# EAGLE board POE (EAGLE 6.4)
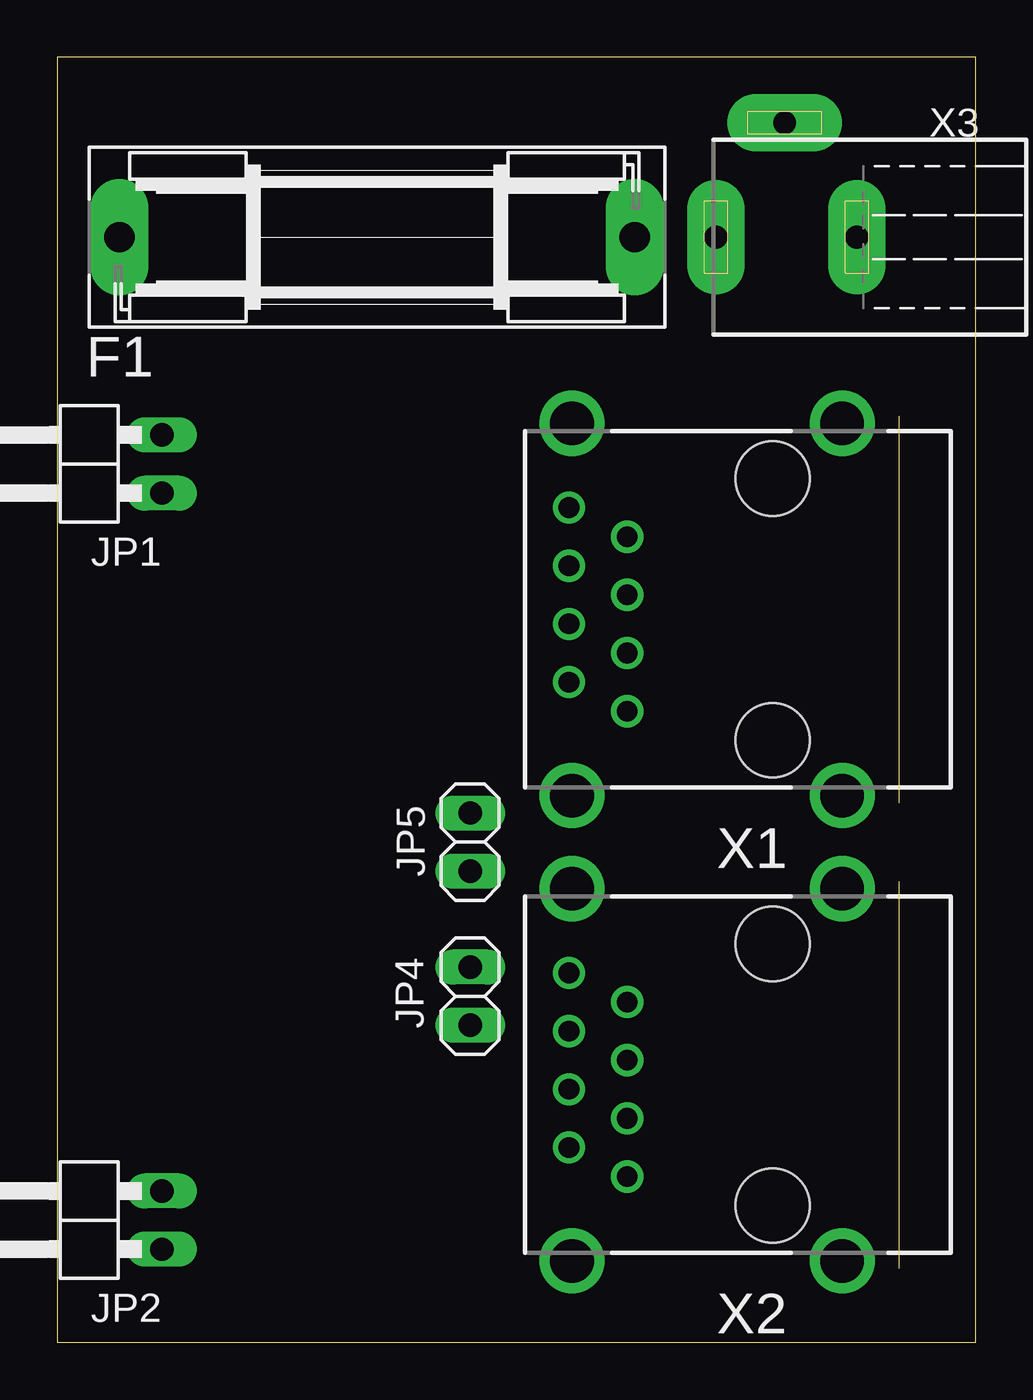
[diagram p0: board, top side]
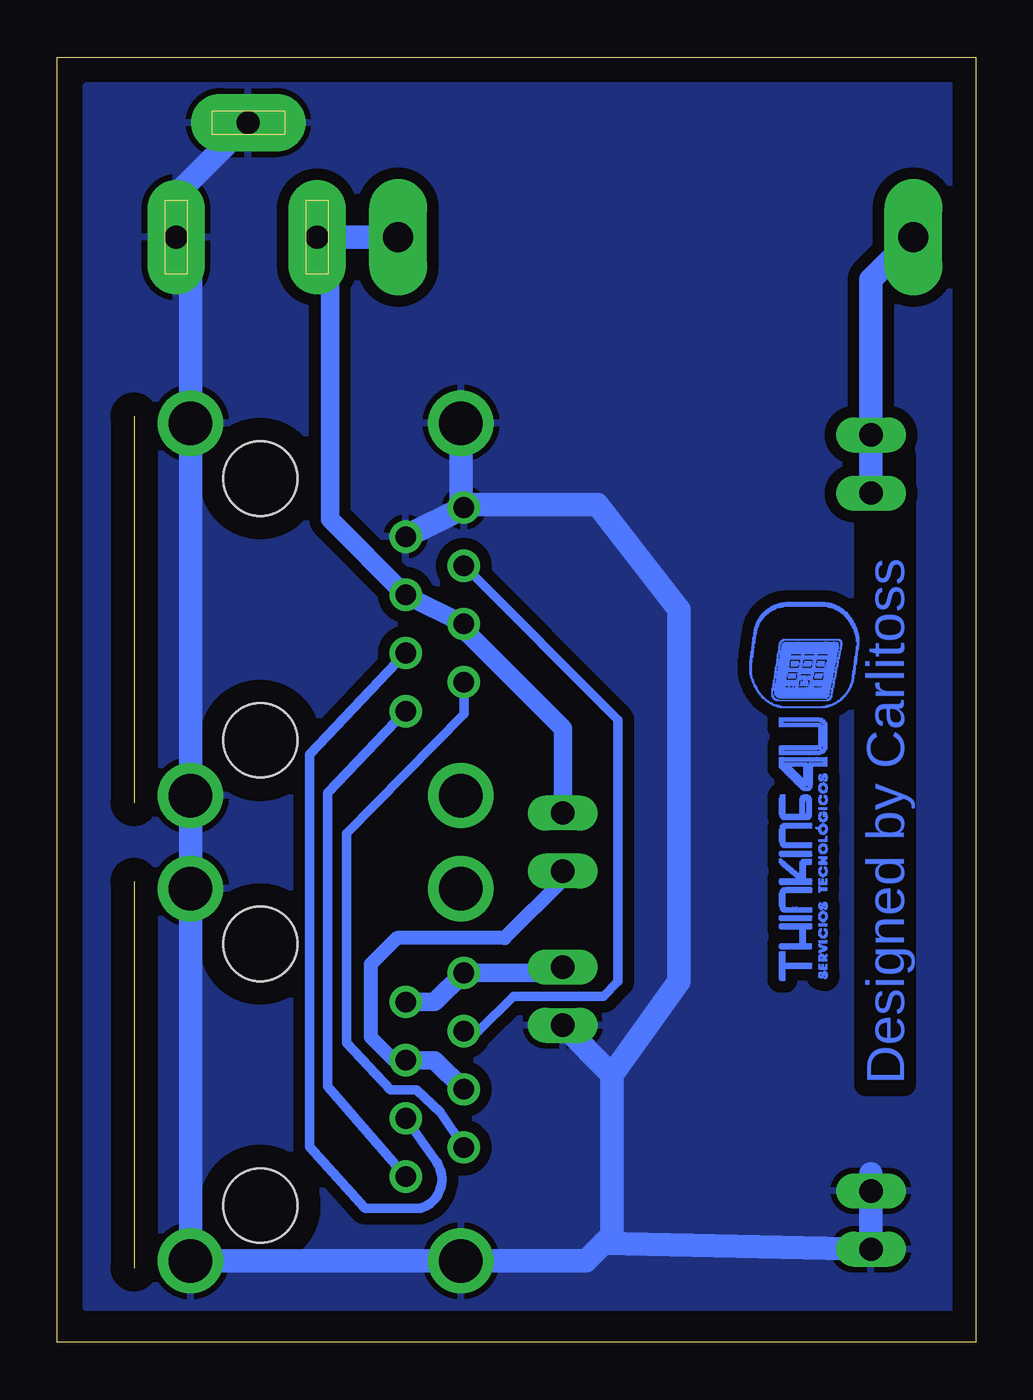
[diagram p1: board, bottom side, seen from below]

Size 40.11 x 56.12 mm. Coordinates in mm from the lower left corner, seen from the top.
Outline: 0,0 40.11,0 40.11,56.12 0,56.12 0,0
Copper layers (1*16): Top 0.035mm / dielectric 1.5mm / Bottom 0.035mm
Design rules "default": minimum track width 10mil, minimum drill 24mil, track to track 20mil, track to pad 20mil, pad to pad 15mil, via to via 8mil, smd to smd 8mil, copper to edge 40mil, drill to drill 8mil, minimum pad ring 10mil, minimum via ring 8mil, stop-mask expansion 4mil, vias tented up to drill 0mil, thermal gap 10mil

## Footprints (pad centres in the part's own frame; a part is rotated, then mirrored left to right if it is on the bottom)
SH22,5 = drill 1.321 pad 2.54 long: 1 -11.252,0; 2 11.252,0
1X02/90 = drill 1.016 long: 1 -1.27,-3.81; 2 1.27,-3.81
1X02 = drill 1.016 long: 1 -1.27,0; 2 1.27,0
RJ45-SHIELD1 = drill 0.9 pad 1.4: 1 -4.445,6.35; 2 -3.175,8.89; 3 -1.905,6.35; 4 -0.635,8.89; 5 0.635,6.35; 6 1.905,8.89; 7 3.175,6.35; 8 4.445,8.89 | drill 1.9 pad 2.5: S1 -8.128,-3.048; S2 8.128,-3.048; S3 -8.128,8.76; S4 8.128,8.76 | hole 3.251: -5.715,0; 5.715,0
733980-62 = drill 1 pad 2.5 long: 1 0,8.57; 2 0,2.42; 3 5,5.57

## Placement (x,y rotation side)
F1  [SH22,5]  13.97,48.26 0 top
JP1  [1X02/90]  0.76,38.35 90 top
JP2  [1X02/90]  0.76,5.33 90 top
JP4  [1X02]  18.03,15.11 90 top
JP5  [1X02]  18.03,21.84 270 top
X1  RJ45-6L21-B  [RJ45-SHIELD1]  31.24,32 90 top
X2  RJ45-6L21-B  [RJ45-SHIELD1]  31.24,11.68 90 top
X3  [733980-62]  37.34,48.26 90 top

## Library data of the parts
F1 = fuse; MF: SCHURTER; MPN: 0031.8201; OC_FARNELL: 1162740; OC_NEWARK: 96F8317
JP1 JP2 JP4 JP5 = pinhead
X1 X2 = con-tycoelectronics; OC_FARNELL: unknown; OC_NEWARK: unknown
X3 = con-conrad

## Nets
GND: JP2.1 JP2.2 JP4.1 X1.7 X1.8 X1.S1 X1.S2 X1.S4 X2.S1 X2.S2 X2.S3 X3.2 X3.3
N$1: F1.1 JP1.1 JP1.2
N$3: X1.6 X2.6
N$6: X1.3 X2.3
N$7: X1.2 X2.2
N$8: X1.1 X2.1
N$9: F1.2 JP5.1 X1.4 X1.5 X3.1
N$10: JP4.2 X2.7 X2.8
N$11: JP5.2 X2.4 X2.5

## Tracks (layer width: path | path; a pad name or v marks a point on that pad's centre or on a via)
GND
  Bottom 0.406: X1.8 22.21,36.3
  Bottom 1.016: X3.3 34.92,50.11 X3.2 34.29,47.63 X1.S2 X1.S1 X2.S2 X2.S1 X2.S3 17.02,3.56 16.26,4.32 | 22.48,36.58 16.51,36.58 12.95,32 12.95,15.75 15.87,11.68 | 15.87,11.68 JP4.1 | 4.57,7.37 JP2.2 JP2.1 16.26,4.32 | 15.87,11.68 15.87,4.7 16.26,4.32 | X1.S4 22.48,36.58 | 22.48,36.58 X1.8 X1.7
  pour Bottom: 0.76,54.86 38.86,54.86 38.86,1.52 0.76,1.52
N$1
  Bottom 1.016: F1.1 4.57,46.41 JP1.2 JP1.1
N$3
  Bottom 0.406: X1.6 15.62,27.18 15.62,15.75 16.26,15.11 20.19,15.11 21.72,13.59 X2.6
N$6
  Bottom 0.406: X1.3 29.09,25.67 29.09,8.53 26.67,5.84 24.26,5.84 arc-108 23.55,7.88 X2.3
N$7
  Bottom 0.406: X1.2 22.35,27.43 27.47,22.23 27.47,13.08 25.56,11.03 24.42,11.03 23.37,10.03 X2.2
N$8
  Bottom 0.406: X2.1 28.31,11.17 28.31,23.99 X1.1
N$9
  Bottom 0.813: JP5.1 18.03,26.8 22.35,31.12 X1.4 X1.5 28.19,35.94 28.19,48.26 X3.1
  Bottom 1.016: F1.2 X3.1
N$10
  Bottom 0.813: JP4.2 18.29,16.13 X2.8 23.62,14.86 X2.7
N$11
  Bottom 0.61: JP5.2 18.03,20.19 20.57,17.65 25.27,17.65 26.42,16.51 26.42,13.34 25.4,12.32 X2.5
  Bottom 0.813: X2.4 23.62,12.32 X2.5
(copper drawn outside any net)
  shapes: Bottom area x2245

## Text on the board
Bottom: Designed by Carlitoss